# Altium PCB PCB_2020-11-10_20-37-01.pcbdoc
Units mm, origin at the board's own origin, x right, y up, seen from the top; angles counter-clockwise.
Board outline 53.28 x 21 mm, 2 copper layers (Top Layer, Bottom Layer), stack 1.569 mm thick; 35 components, 69 nets, 183 pads, 48 vias.
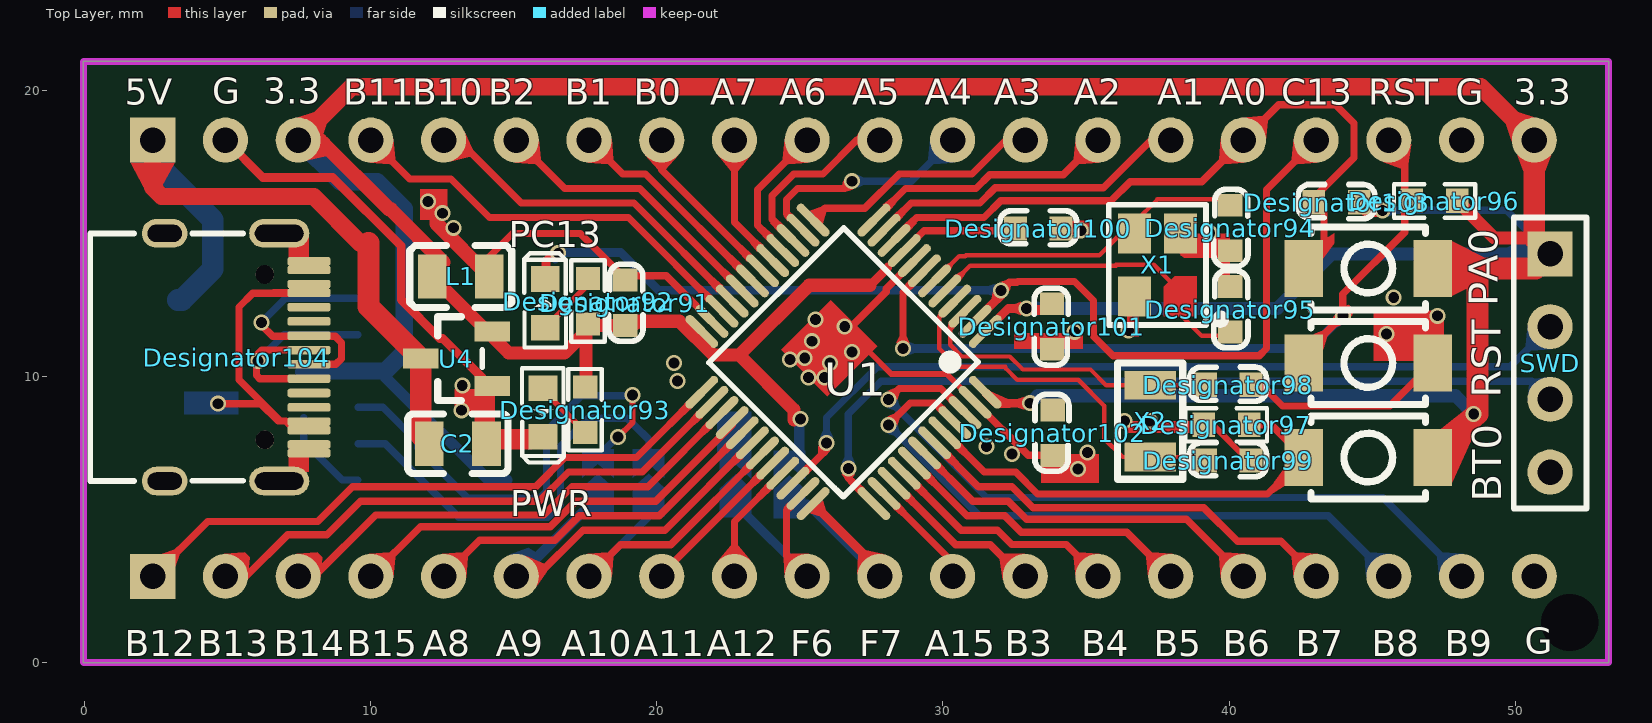
[diagram p0: Top Layer view]
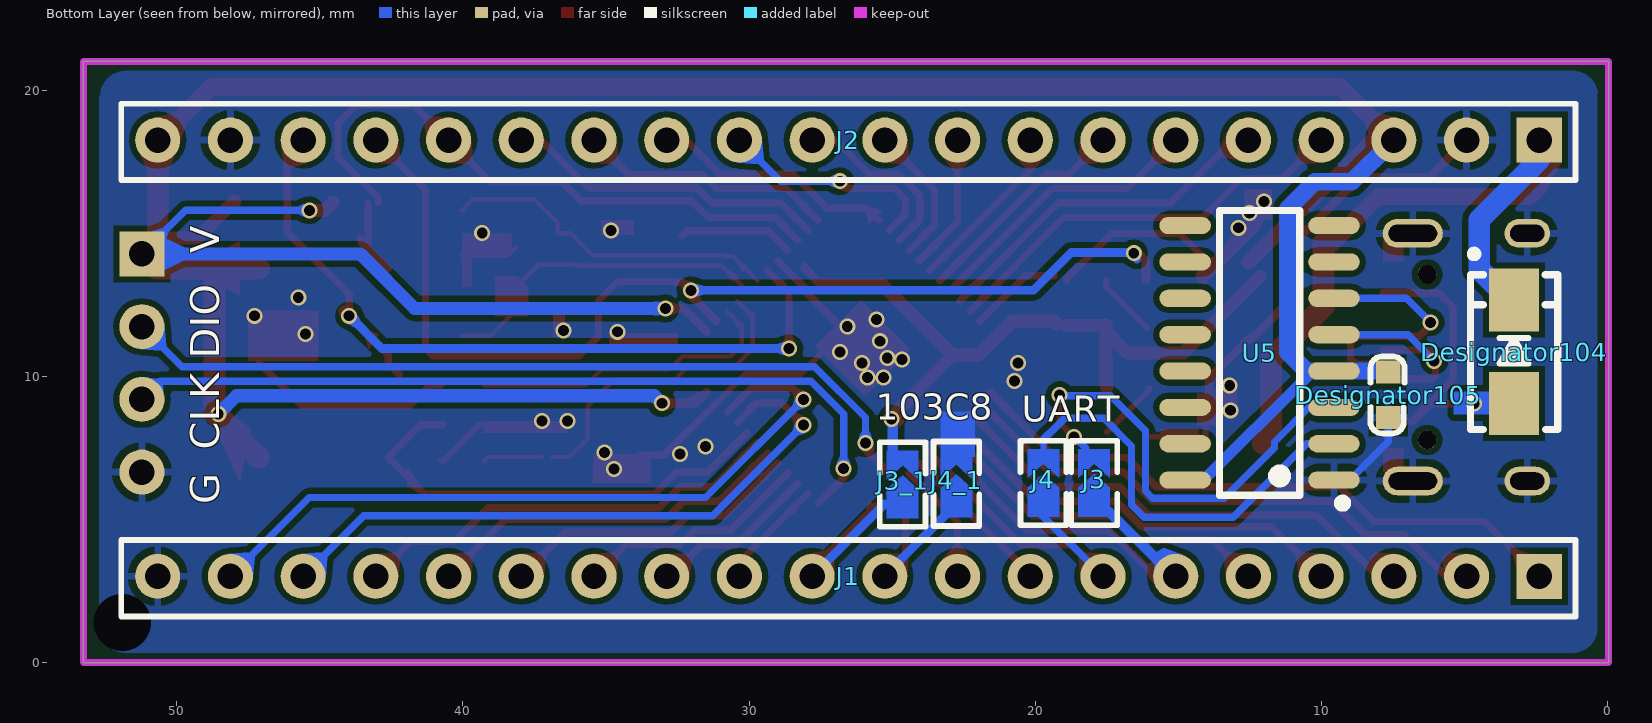
[diagram p1: Bottom Layer view, seen from below]

## Layer stack, top to bottom
Top Solder: solder mask 0.0254, SM-001, Dk 4
Top Layer: signal copper 0.035
Dielectric 1: core 1.4986, Core-043, Dk 4.3
Bottom Layer: signal copper 0.035
Bottom Solder: solder mask 0.0254, SM-001, Dk 4

## Board outline
-0.025,0 -0.025,21 53.25,21 53.25,0

## Design rules (kind name [scope] priority, off if disabled: settings)
Clearance [All] p1: gap=0.203 ignorepadtopadclearanceinfootprint=FALSE except(0: Arc-Hole Track-Hole SMDPad-Hole THPad-Hole Via-Hole Fill-Hole Poly-Hole Region-Hole Text-Hole)
PolygonConnect PolygonConnect_1 [IsVia] p1: connectstyle=Direct reliefconductorwidth=0.254 reliefentries=4 polygonreliefangle="90 Angle" airgapwidth=0.254
PolygonConnect [All] p2: connectstyle=Relief reliefconductorwidth=0.254 reliefentries=4 polygonreliefangle="90 Angle" airgapwidth=0.254
RoutingVias [All] p1: holewidth=0.711 width=1.27 viastyle="Through Hole" minholewidth=0.711 minwidth=1.27 maxholewidth=0.711 maxwidth=1.27
SolderMaskExpansion [All] p1: expansion=0.102 istentingtop=FALSE
Width [All] p1: maxlimit=2.54 minlimit=0.152 preferedwidth=0.254
30 further rules are at their usual default settings.

## Components (designator, comment, footprint, x,y, rotation, side; value= is the part's Value field where it differs from the comment)
BT0 "TS-1088R-02026" SW-SMD_L3.9-W3.0-P4.45 44.856,7.163 r0 top
C2 "10u" C0805 13.056,7.645 r180 top
Designator91 "Comment" 0603_C 18.898,12.598 r270 top
Designator92 "Comment" 0603-R 17.602,12.624 r270 top
Designator93 "Comment" 0603-R 17.501,8.839 r90 top
Designator94 "Comment" 0603_C 40.03,15.215 r270 top
Designator95 "Comment" 0603_C 40.03,12.37 r270 top
Designator96 "Comment" 0603-R 47.168,16.129 r180 top
Designator97 "Comment" 0603-R 39.903,8.306 r0 top
Designator98 "Comment" 0603_C 39.929,9.703 r0 top
Designator99 "Comment" 0603_C 39.929,7.061 r0 top
Designator100 "Comment" 0603_C 33.299,15.164 r0 top
Designator101 "Comment" 0603_C 33.807,11.709 r90 top
Designator102 "Comment" 0603_C 33.833,8.001 r90 top
Designator103 "Comment" 0603_C 43.713,16.078 r0 top
Designator104 "Comment" USB-TYPE-C- 5.334,10.668 r180 top
Designator104 "Comment" DO-SMAA 3.277,10.846 r90 bottom
Designator105 "Comment" 0603_C 7.671,9.322 r90 bottom
J1 "HDR-M-2.54_1x20" HDR-M-2.54_1X20 26.525,3.013 r180 bottom
J2 "HDR-M-2.54_1x20" HDR-M-2.54_1X20 26.525,18.253 r180 bottom
J3 "JUMPER" JUMPER-0603 17.941,6.402 r90 bottom
J3_1 "JUMPER" JUMPER-0603 24.638,6.35 r90 bottom (schematic designator J3)
J4 "JUMPER" JUMPER-0603 19.719,6.402 r90 bottom
J4_1 "JUMPER" JUMPER-0603 22.758,6.375 r90 bottom (schematic designator J4)
L1 "10uH" L0805 13.157,13.487 r0 top
PA0 "TS-1088R-02026" SW-SMD_L3.9-W3.0-P4.45 44.856,13.767 r0 top
PC13 "LED-0603_R" LED0603_RED 16.104,12.548 r90 top
PWR "LED-0603_G" LED0603_GREEN 16.027,8.738 r270 top
RST "TS-1088R-02026" SW-SMD_L3.9-W3.0-P4.45 44.856,10.465 r0 top
SWD "HDR-M-2.54_1x4" HDR-M-2.54_1X4 51.206,10.465 r270 top
U1 "STM32F030C8T6" LQFP-48_L7.0-W7.0-P0.50-LS9.0-BL 26.525,10.506 r135 top locked
U4 "XC6206P332MR" SOT-23(SOT-23-3) 13.005,10.617 r90 top
U5 "CH340G" SOP16_L 12.167,10.82 r0 bottom
X1 "8MHz" OSC-SMD_4P-L3.2-W2.5-BL 37.49,13.894 r90 top
X2 "32.768KHz" OSC-SMD_L3.2-W1.5 37.236,8.433 r90 top

## Footprints (in the part's own frame and the unit in brackets; to place one, negate y for a bottom-side part, rotate by r counter-clockwise, add the part's x,y. Pads: shape width x height; smd on the part's side, far side on the other; paste and mask are expansions set on the pad)
0603-R [mm]
  rect 0.8x0.85 smd: 1(-0.795,0) 2(0.795,0)
  silkscreen extent -1.43,-0.58 1.42,0.58, body extent -0.8,-0.41 0.8,0.39, height 0.4
0603_C [mm]
  rect 0.8x0.85 smd: 1(-0.762,0) 2(0.827,0)
  silkscreen extent -1.32,-0.57 1.37,0.62, body extent -0.8,-0.41 0.8,0.41, height 0.81
C0805 [mm]
  rect 1x1.55 smd: 1(-1,0) 2(1,0)
  silkscreen extent -1.75,-1.04 1.75,1.04
DO-SMAA [mm] "4.5x2.6*2.2mm（长宽高，不包括引脚）"
  rect 2.2x1.75 smd: 1(-1.8,0) 2(1.825,0)
  silkscreen extent -2.7,-1.52 3.56,1.52, body extent -2.53,-1.3 2.58,1.3, height 2.15
HDR-M-2.54_1X4 [mil]
  rect 62x62 hole 35: 1(-150,0)
  round 62 hole 35: 2(-50,0) 3(50,0) 4(150,0)
  silkscreen extent -200,-50 200,50
HDR-M-2.54_1X20 [mil]
  rect 62x62 hole 35: 1(950,0)
  round 62 hole 35: 2(850,0) 3(750,0) 4(650,0) 5(550,0) 6(450,0) 7(350,0) 8(250,0) 9(150,0) 10(50,0) 11(-50,0) 12(-150,0) 13(-250,0) 14(-350,0) 15(-450,0) 16(-550,0) 17(-650,0) 18(-750,0) 19(-850,0) 20(-950,0)
  silkscreen extent -1000,-55 1000,50
JUMPER-0603 [mm]
  Top Layer region: 1.05,-0.55 0.05,-0.55 0.55,0 0.05,0.55 1.05,0.55
  Top Layer region: -0.3,-0.55 -1.3,-0.55 -1.3,0.55 -0.3,0.55 0.2,0
  silkscreen extent -1.6,-0.8 1.35,0.8
L0805 [mm]
  rect 1x1.55 smd: 1(-1,0) 2(1,0)
  silkscreen extent -1.78,-1.08 1.78,1.08
LED0603_GREEN [mm]
  rect 0.9x1 smd: 1(-0.85,0) 2(0.85,0)
  silkscreen extent -1.54,-0.73 1.75,0.73
LED0603_RED [mm]
  rect 0.9x1 smd: 1(-0.85,0) 2(0.85,0)
  silkscreen extent -1.54,-0.73 1.75,0.73
LQFP-48_L7.0-W7.0-P0.50-LS9.0-BL [mm]
  oval 0.3x1.5 smd: 1(-2.75,-4.25) 2(-2.25,-4.25) 3(-1.75,-4.25) 4(-1.25,-4.25) 5(-0.75,-4.25) 6(-0.25,-4.25) 7(0.25,-4.25) 8(0.75,-4.25) 9(1.25,-4.25) 10(1.75,-4.25) 11(2.25,-4.25) 12(2.75,-4.25) 25(2.75,4.25) 26(2.25,4.25) 27(1.75,4.25) 28(1.25,4.25) 29(0.75,4.25) 30(0.25,4.25) 31(-0.25,4.25) 32(-0.75,4.25) 33(-1.25,4.25) 34(-1.75,4.25) 35(-2.25,4.25) 36(-2.75,4.25)
  oval 1.5x0.3 smd: 13(4.25,-2.75) 14(4.25,-2.25) 15(4.25,-1.75) 16(4.25,-1.25) 17(4.25,-0.75) 18(4.25,-0.25) 19(4.25,0.25) 20(4.25,0.75) 21(4.25,1.25) 22(4.25,1.75) 23(4.25,2.25) 24(4.25,2.75) 37(-4.25,2.75) 38(-4.25,2.25) 39(-4.25,1.75) 40(-4.25,1.25) 41(-4.25,0.75) 42(-4.25,0.25) 43(-4.25,-0.25) 44(-4.25,-0.75) 45(-4.25,-1.25) 46(-4.25,-1.75) 47(-4.25,-2.25) 48(-4.25,-2.75)
  silkscreen extent -3.33,-3.31 3.3,3.34
OSC-SMD_4P-L3.2-W2.5-BL [mm]
  rect 1.4x1.15 smd: 2(1.1,-0.8) 3(1.1,0.8) 4(-1.1,0.8)
  Top Layer region: -1.8,-0.225 -0.762,-0.225 -0.4,-0.604 -0.4,-1.375 -1.8,-1.375
  silkscreen extent -2.1,-2.35 2.1,1.7
OSC-SMD_L3.2-W1.5 [mm]
  rect 1x1.8 smd: 1(-1.25,0) 2(1.25,0)
  silkscreen extent -2.03,-1.14 2.03,1.14
SOP16_L [mm]
  oval 1.8x0.6 smd: 1(-2.6,4.445) 2(-2.6,3.175) 3(-2.6,1.905) 4(-2.6,0.635) 5(-2.6,-0.635) 6(-2.6,-1.905) 7(-2.6,-3.175) 8(-2.6,-4.445) 9(2.6,-4.445) 10(2.6,-3.175) 11(2.6,-1.905) 12(2.6,-0.635) 13(2.6,0.635) 14(2.6,1.905) 15(2.6,3.175) 16(2.6,4.445)
  silkscreen extent -3.05,-4.97 1.4,5.4, body extent -2,-5.08 2,5.08, height 1.75
SOT-23(SOT-23-3) [mm]
  rect 0.7x1.25 smd: 1(-0.95,-1.25) 2(0.95,-1.25) 3(0,1.25)
  silkscreen extent -1.46,-0.9 1.46,0.65
SW-SMD_L3.9-W3.0-P4.45 [mm]
  rect 1.35x2 smd: 1(-2.25,0) 2(2.25,0)
  silkscreen extent -2,-1.45 2,1.45
USB-TYPE-C- [mm]
  round 0.65 hole 0.65: 0(-0.98,2.89) 0(-0.98,-2.89)
  oval 1.6x1 hole 0.6 slot 1.2 at 0 deg: 1(2.52,4.325) 2(2.52,-4.325)
  oval 2.1x1 hole 0.6 slot 1.7 at 0 deg: 3(-1.48,-4.325) 4(-1.48,4.325)
  rrect50% 1.5x0.3 smd: A1(-2.52,-3.35) A4(-2.52,-2.55) A5(-2.52,-1.25) A6(-2.52,-0.25) A7(-2.52,0.25) A8(-2.52,1.25) A9(-2.52,2.55) A12(-2.52,3.35) B1(-2.52,3.05) B4(-2.52,2.25) B5(-2.52,1.75) B6(-2.52,0.75) B7(-2.52,-0.75) B8(-2.52,-1.75) B9(-2.52,-2.25) B12(-2.52,-3.05)
  silkscreen extent -0.22,-4.33 5.12,4.33, body extent -2.64,-4.48 5.26,4.46, height 3.28

## Part data
U5: "USB2UART"

## Free pads (board coordinates)
  round 1.524 hole 2 mask+0.102: 1(51.892,1.397)

## Via types
v1: diameter 0.559, hole 0.381, Top Layer to Bottom Layer, 48 vias

## Nets (pads, with @x,y where several pads share a name; then routed paths per layer and width w, separated by ;. In a path a pad name is that pad's centre, name@x,y a point inside that pad or via, vN(x,y) a via of type N, cw(c..) or ccw(c..) an arc to the next point about the centre after c; other vN are vias at no path point)
+3.3: 
+5V: C2.2 Designator104.2@3.277,12.671 J2.1 U4.3 | length 24.9
  Top Layer w0.61: J2.1 2.395,16.604 2.718,16.281 8.026,16.281 9.652,14.656 9.931,14.656
  Top Layer w0.762: 9.931,14.656 9.931,12.441 U4.3 11.755,7.946 C2.2
  Bottom Layer w0.762: J2.1 2.395,17.569 4.496,15.469 4.496,13.741 3.425,12.671 Designator104.2@3.277,12.671
BOOT0: BT0.1 Designator97.2 U1.44 | length 16.3
  Top Layer w0.254: U1.44 31.438,6.655 32.537,6.655 33.299,5.893 41.336,5.893 BT0.1 41.463,8.306 Designator97.2
CC1: Designator104.A5
CC2: Designator104.B5
DTR: U5.13
GND: C2.1 Designator91.1 Designator94.2 Designator95.1 Designator97.1 Designator98.2 Designator99.2 Designator100.2 Designator101.1 Designator102.1 Designator104.1@2.814,6.343 Designator104.2@2.814,14.993 Designator104.3 Designator104.4 Designator104.A1 Designator104.A12 Designator104.B1 Designator104.B12 Designator105.1 J1.20 J2.2 J2.19 L1.2 pad.1 PWR.2 RST.2 SWD.4 U1.8 U1.23 U1.47 U4.1 U5.1 X1.2 X1.4 | length 57.7
  Top Layer w0.152: X1.2@38.163,14.486 38.44,14.209 Designator94.2@40.03,14.209
  Top Layer w0.203: 14.056,9.271 C2.1 14.298,7.888 PWR.2 ; v1(26.822,10.846) 27.432,10.846 28.194,10.084 30.129,10.084 U1.47 ; Designator97.1 39.421,8.306 40.665,7.061 Designator99.2
  Top Layer w0.254: L1.2 14.157,14.183 14.961,14.986 17.327,14.986 18.898,13.415 Designator91.1 ; 19.329,13.513 20.336,13.513 U1.23 ; v1(26.568,11.735) 26.8,11.735 28.016,12.951 28.016,13.057 U1.8 ; U1.47 32.974,7.239 Designator102.1 ; Designator98.2 41.123,9.703 41.859,8.966 45.608,8.966 RST.2
  Top Layer w0.305: J2.2 6.246,16.942 8.688,16.942 11.074,14.556 11.074,12.675 12.426,11.323 12.527,11.323 13.919,9.931 13.919,9.271
  Top Layer w0.508: 12.319,16.129 12.319,15.326 L1.2
  Bottom Layer w0.254: Designator105.1 7.671,7.722 9.017,6.375 U5.1
  other v1: 34.722,6.756 32.41,7.29 35.052,7.341 31.521,7.544 36.347,8.433 37.236,8.433 13.183,8.814 13.208,9.677 20.726,9.83 25.298,9.957 25.857,9.957 20.599,10.465 26.06,10.465 24.663,10.592 25.171,10.643 25.425,11.227 45.491,11.481 34.595,11.557 36.474,11.608 25.552,11.989 47.269,12.116 45.745,12.751 39.319,15.011 34.823,15.088 12.903,15.189 12.522,15.697 12.014,16.104
J3_1: U5.3 | length 16.4
  Top Layer w0.203: v1(18.644,7.874) 19.152,8.382 v1(19.152,9.347)
  Bottom Layer w0.254: U5.3 10.439,8.915 11.646,7.709 11.646,7.506 13.407,5.745 15.905,5.745 16.154,5.994 16.154,8.103 17.374,9.322 v1@19.101,9.322 ; 18.237,7.01 18.237,7.493 v1@18.644,7.899
J4_1: U5.2 | length 15.1
  Bottom Layer w0.203: 19.456,8.045 19.514,8.045 19.719,7.84 19.719,7.202
  Bottom Layer w0.254: U5.2 10.516,7.645 13.081,5.08 16.205,5.08 16.637,5.512 16.637,7.569 17.602,8.534 18.967,8.534 19.719,7.782
NRST: Designator96.2 J2.18 RST.1 U1.7 | length 28.9
  Top Layer w0.254: v1(28.6,10.973) 28.6,12.934 U1.7 ; RST.1@42.217,10.076 RST.1 42.606,10.754 v1(43.967,12.116) 43.967,12.878 46.126,15.037 46.126,17.701 J2.18
  Bottom Layer w0.305: v1(28.6,10.973) 42.824,10.973 v1(43.967,12.116)
OSC32-IN: Designator98.1 U1.3 X2.2 | length 11
  Top Layer w0.152: U1.3 30.251,11.76 30.251,11.1 30.658,10.693 32.334,10.693 32.791,10.236 35.154,10.236 35.707,9.683 X2.2 39.248,9.683 Designator98.1@39.268,9.703
OSC32-OUT: Designator99.1 U1.4 X2.1 | length 13.2
  Top Layer w0.152: U1.4@30.414,12.624 29.87,12.083 29.87,10.973 30.505,10.338 32.182,10.338 32.182,10.287 32.588,9.881 34.722,9.881 35.636,8.966 35.636,7.823 36.276,7.183 X2.1@36.855,7.183 ; X2.1 39.121,7.183 Designator99.1@39.268,7.036
OSC-IN: Designator95.2 U1.5 | length 11
  Top Layer w0.152: U1.5@30.061,12.982 30.594,13.513 30.949,13.868 36.043,13.868 ; 36.043,13.894 37.363,13.894 38.125,13.132 ; 38.163,12.286 39.034,11.415 Designator95.2@40.03,11.415
OSC-OUT: Designator94.1 U1.6 X1.3 | length 11.9
  Top Layer w0.152: U1.6 30.571,14.199 30.777,14.199 30.802,14.224 35.458,14.224 36.228,14.994 X1.3 36.69,15.38 37.49,16.18 39.649,16.18 Designator94.1@40.03,15.799
PA0: Designator103.1 J2.16 PA0.1 U1.10 | length 24.2
  Top Layer w0.254: U1.10 29.088,15.545 31.431,15.545 32.016,16.129 35.872,16.129 36.537,16.794 39.035,16.794 J2.16 41.725,19.482 43.713,19.482 44.356,18.839 44.356,17.635 42.951,16.231 Designator103.1 ; PA0.1 43.307,14.467 Designator103.1@43.307,16.053
PA1: J2.15 U1.11 | length 11.3
  Top Layer w0.254: U1.11 28.89,16.053 31.293,16.053 31.826,16.586 35.611,16.586 37.277,18.253 J2.15
PA2: J2.14 U1.12 | length 9
  Top Layer w0.254: U1.12 28.692,16.561 31.154,16.561 31.637,17.043 34.206,17.043 J2.14
PA3: J2.13 U1.13 | length 8.6
  Top Layer w0.254: U1.13@25.463,15.456 25.875,15.867 27.272,15.867 28.473,17.069 31.016,17.069 32.2,18.253 J2.13
PA4: J2.12 U1.14 | length 8
  Top Layer w0.254: U1.14 24.536,15.677 24.536,16.18 24.917,16.561 25.298,16.561 26.568,16.561 v1(26.822,16.815)
  Bottom Layer w0.254: v1(26.822,16.815) 28.898,16.815 J2.12
PA5: J2.11 U1.15 | length 6.4
  Top Layer w0.254: U1.15 24.028,15.479 24.028,16.307 24.79,17.069 25.806,17.069 26.99,18.252 J2.11
PA6: J2.10 U1.16 | length 4.9
  Top Layer w0.254: U1.16 23.52,15.278 23.52,16.518 J2.10
PA7: J2.9 U1.17 | length 4.8
  Top Layer w0.254: J2.9 22.715,15.377 U1.17
PA8: J1.5 U1.29 | length 12.5
  Top Layer w0.254: J1.5 13.813,4.27 16.436,4.27 17.297,5.131 20.089,5.131 U1.29
PA9: J1.6 U1.30 | length 17.2
  Top Layer w0.254: J1.6 15.814,3.012 17.424,4.623 20.287,4.623 U1.30
  Bottom Layer w0.254: 17.399,5.316 J1.6 15.23,3.013 17.819,5.602
PA10: J1.7 U1.31 | length 11.8
  Top Layer w0.254: J1.7 18.738,4.115 20.488,4.115 U1.31@23.696,7.323
  Bottom Layer w0.254: J1.7@17.424,3.223 J1.7 19.914,5.291 19.914,5.74
PA11: J1.8 U1.32 | length 5.6
  Top Layer w0.254: J1.8 20.175,3.094 U1.32
PA12: J1.9 U1.33 | length 4.3
  Top Layer w0.254: J1.9 22.715,4.928 U1.33
PA15: J1.12 U1.38 | length 3.9
  Top Layer w0.254: U1.38 30.335,3.513 J1.12
PB0: J2.8 U1.18 | length 6
  Top Layer w0.254: J2.8 20.175,17.209 U1.18@23.696,13.688
PB1: J2.7 U1.19 | length 7.7
  Top Layer w0.254: J2.7 18.819,17.069 19.609,17.069 U1.19
PB2: J2.6 U1.20 | length 10.1
  Top Layer w0.254: J2.6 16.787,16.561 19.411,16.561 U1.20
PB3: J1.13 U1.39 | length 5.9
  Top Layer w0.254: U1.39 30.442,4.115 31.648,4.115 32.751,3.012 J1.13
PB4: J1.14 U1.40 | length 8.3
  Top Layer w0.254: U1.40 30.64,4.623 31.902,4.623 32.403,4.122 34.305,4.122 J1.14
PB5: J1.15 U1.41 | length 10.6
  Top Layer w0.254: U1.41 30.838,5.131 32.156,5.131 32.736,4.552 36.416,4.552 J1.15
PB6: J1.16 U1.42 | length 12.9
  Top Layer w0.254: U1.42 31.039,5.639 32.283,5.639 32.918,5.004 38.504,5.004 J1.16
PB7: J1.17 U1.43 | length 15.3
  Top Layer w0.254: U1.43 31.237,6.147 32.41,6.147 33.144,5.413 39.113,5.413 40.284,4.242 41.806,4.242 J1.17
PB8: J1.18 U1.45 | length 22.6
  Top Layer w0.254: v1(28.092,8.306) 28.854,9.068 29.731,9.068 U1.45
  Bottom Layer w0.254: v1(28.092,8.306) 31.267,5.131 43.457,5.131 J1.18
PB9: J1.19 U1.46 | length 25.8
  Top Layer w0.254: v1(28.092,9.195) 28.473,9.576 29.931,9.576 U1.46
  Bottom Layer w0.254: v1(28.092,9.195) 31.521,5.766 45.362,5.766 J1.19
PB10: J2.5 U1.21 | length 12.4
  Top Layer w0.254: J2.5 13.066,18.252 15.265,16.053 19.21,16.053 U1.21
PB11: J2.4 U1.22 | length 14.7
  Top Layer w0.254: J2.4 11.372,16.896 12.812,16.896 14.163,15.545 19.012,15.545 U1.22
PB12: J1.1 U1.25 | length 21.8
  Top Layer w0.254: J1.1 4.314,4.931 8.157,4.931 9.373,6.147 15.773,6.147 16.789,7.163 19.291,7.163 U1.25
PB13: J1.2 U1.26 | length 19.5
  Top Layer w0.254: J1.2 5.654,3.013 7.112,4.47 8.484,4.47 9.652,5.639 15.9,5.639 16.916,6.655 19.494,6.655 U1.26
PB14: J1.3 U1.27 | length 17.2
  Top Layer w0.254: J1.3 8.042,3.013 10.188,5.159 16.055,5.159 17.043,6.147 19.693,6.147 U1.27
PB15: J1.4 U1.28 | length 14.9
  Top Layer w0.254: J1.4 11.753,4.75 16.281,4.75 17.17,5.639 19.964,5.639 22.636,8.311 U1.28
PC13: J2.17 PC13.2 U1.2 | length 38.2
  Top Layer w0.254: v1(32.029,13.005) 32.309,13.284 32.588,13.284 32.614,13.31 34.595,13.31 35.255,12.649 35.255,11.405 35.941,10.719 41.046,10.719 41.3,10.973 41.3,16.518 J2.17
  Top Layer w0.305: PC13.2@16.135,13.366 16.135,14.027 16.408,14.3 v1(16.561,14.3) ; U1.2 32.029,12.827 v1(32.029,13.005)
  Bottom Layer w0.305: v1@16.459,14.097 16.688,14.326 18.745,14.326 20.066,13.005 v1(32.029,13.005)
PF6: J1.10 U1.35 | length 7
  Top Layer w0.254: U1.35 24.536,5.334 24.536,3.731 J1.10
  Bottom Layer w0.203: 22.86,5.359 22.936,5.359 ; J1.10@25.197,3.099 J1.10@25.502,3.099
  Bottom Layer w0.305: 22.936,5.359 J1.10@25.197,3.099
PF7: J1.11 U1.36 | length 7.3
  Top Layer w0.254: J1.11 J1.11@27.795,3.226
  Top Layer w0.305: U1.36@25.555,5.464 J1.11@27.795,3.226
  Bottom Layer w0.203: 24.638,5.55 25.26,5.55
  Bottom Layer w0.305: 25.26,5.55 J1.11@27.584,3.226
PGND: 
PWR_1: Designator93.1 PWR.1 | length 2.2
  Top Layer w0.203: PWR.1 16.027,9.518 Designator93.1
Q1_3: 
R3_1: Designator92.1 PC13.1 | length 2.3
  Top Layer w0.203: PC13.1 17.526,13.12 Designator92.1@17.526,13.393
RTS: U5.14
S$33: 
S$35: 
S$39: 
S$69: 
S$2359: 
SWCLK: SWD.3 U1.37 | length 28.7
  Top Layer w0.254: v1(26.695,6.782) 26.695,6.447 U1.37
  Bottom Layer w0.254: v1(26.695,6.782) 26.695,8.687 27.838,9.83 50.571,9.83 SWD.3
SWDIO: SWD.2 U1.34 | length 29.4
  Top Layer w0.254: U1.34 25.933,7.44 v1(25.933,7.671)
  Bottom Layer w0.254: v1(25.933,7.671) 25.933,8.56 27.711,10.338 49.809,10.338 SWD.2
U2_1: 
U2_2: 
USB_1: 
USB_D+: 
USB_D-: 
USBD+: Designator104.A6 Designator104.B6 U5.5 | length 8.4
  Top Layer w0.254: Designator104.B6 6.135,9.918 6.02,10.033 6.02,10.744 6.194,10.918 Designator104.A6
  Bottom Layer w0.254: v1(6.071,10.541) 6.985,11.455 U5.5
USBD-: Designator104.A7 Designator104.B7 U5.6 | length 8.6
  Top Layer w0.254: v1(6.198,11.887) 6.198,11.786 6.585,11.398 8.769,11.398 8.992,11.176 8.992,10.617 8.792,10.418 Designator104.A7
  Bottom Layer w0.254: v1(6.198,11.887) 7.036,12.725 U5.6
VBUS-OUT: Designator104.1@3.277,9.046 Designator104.A4 Designator104.A9 Designator104.B4 Designator104.B9 | length 11.5
  Top Layer w0.254: v1(4.674,9.042) 6.169,9.042 6.774,8.438 6.853,8.438 ; 6.619,12.918 Designator104.B9 ; Designator104.A9@7.366,8.118 7.046,8.438 6.853,8.438 ; Designator104.B9@7.854,12.903 5.892,12.903 5.41,12.421 5.41,9.881 6.853,8.438
VCC: BT0.2 Designator91.2 Designator92.2 Designator93.2 Designator96.1 Designator100.1 Designator101.2 Designator102.2 Designator103.2 Designator105.2 J2.3 J2.20 L1.1 PA0.2 SWD.1 U1.1 U1.9 U1.24 U1.48 U4.2 U5.4 U5.16 | length 164
  Top Layer w0.254: U1.9 29.339,15.088 32.156,15.088 Designator100.1@32.334,14.91
  Top Layer w0.305: 27.457,13.183 28.07,13.796 28.07,13.819 ; U1.48 31.859,9.06 v1(33.045,9.06) ; U1.1 32.278,12.37 v1(32.918,12.37)
  Top Layer w0.457: L1.1 14.829,10.816 16.782,10.816 Designator92.2@17.526,11.559 ; Designator93.2 17.526,9.659 Designator92.2@17.526,11.559 ; Designator91.2 17.559,11.771 17.526,11.804 Designator92.2@17.526,11.559 ; Designator91.2@19.235,11.829 19.329,11.923 20.792,11.923 21.971,10.744 22.555,10.744 22.885,10.744 ; v1@24.79,8.484 24.79,8.839 22.885,10.744 ; 27.457,13.183 25.324,13.183 22.885,10.744 ; Designator103.2 44.82,15.799 v1(45.356,15.799) ; Designator96.1 49.266,14.826 SWD.1@50.655,14.826
  Top Layer w0.508: J2.3 8.24,18.252 10.654,15.838 10.701,15.838 L1.1@12.548,13.991
  Top Layer w0.61: J2.3 9.34,20.117 48.791,20.117 J2.20
  Top Layer w0.762: BT0.2 47.142,7.163 48.666,8.687 48.666,13.767 ; PA0.2 50.698,13.767 SWD.1 50.655,14.826 J2.20
  Bottom Layer w0.254: v1(45.356,15.799) 49.682,15.799 SWD.1
  Bottom Layer w0.381: 10.516,10.185 10.516,9.982 14.122,6.375 U5.16
  Bottom Layer w0.457: v1(32.918,12.37) 41.681,12.37 43.586,14.275 SWD.1 ; v1(33.045,9.06) 33.307,9.322 47.904,9.322 v1(48.539,8.687)
  Bottom Layer w0.61: J2.3 8.939,16.789 10.236,16.789 11.176,15.85 11.176,10.846 10.516,10.185 U5.4 7.707,10.185 Designator105.2
  other v1: 25.019,8.509
VDDA: 
pads on no net: Designator104.0 Designator104.A8 Designator104.B8 U5.7 U5.8 U5.9 U5.10 U5.11 U5.12 U5.15

## Polygon pours and split planes (outlines as drawn)
GND on Bottom Layer "Bottom Layer-No Net" (solid, remove dead copper, pour order 8): -1.219,25.756 -1.219,-1.524 -2.464,-2.769 -2.159,-2.464 56.007,-2.464 56.007,24.384 57.099,25.476 56.185,24.562 -10.82,24.562

## Keep-outs
Keep-Out Layer:
  lines w0.254: 53.2,0 -0.025,0 -0.025,21 53.2,21 ; 53.25,0 53.25,21

## Other copper
Top Layer:
  rectangle net VCC: 32.995,12.141 33.909,12.497
  rectangle net GND: 7.137,14.018 7.854,14.859
  rectangle net GND: 7.137,6.652 7.854,7.493
  rectangle net GND: 13.64,8.28 14.356,9.398
  region net GND: 15.649,7.442 15.649,8.159 14.298,8.159 14.298,7.442
  rectangle net GND: 12.929,8.661 13.792,9.55
  rectangle net GND: 11.735,15.469 12.7,16.535
  rectangle net GND: 33.426,6.274 35.458,7.29
  region net GND: 25.959,9.296 27.711,11.049 26.086,12.675 24.333,10.922
  rectangle net GND: 38.291,14.209 40.03,14.994
  rectangle net GND: 39.7,13.132 40.03,14.199
  rectangle net GND: 36.424,11.379 36.855,12.497
  rectangle net GND: 34.036,14.935 35.179,15.443
  rectangle net GND: 36.347,8.026 39.268,8.433
  rectangle net GND: 45.034,10.541 47.498,12.294
  rectangle net GND: 32.487,10.947 34.9,11.506
  region net VCC: 31.648,9.485 31.971,8.889 32.35,8.908 32.237,9.213
  region net PB9: 30.45,9.268 30.238,9.056 29.985,9.342 30.165,9.522
  region net PB8: 30.096,8.915 29.884,8.703 29.641,8.978 29.82,9.158
  region net BOOT0: 30.591,7.713 30.379,7.501 30.665,7.248 30.845,7.427
  region net PB7: 30.238,7.359 30.026,7.147 30.311,6.894 30.491,7.074
  region net PB6: 29.884,7.006 29.672,6.793 29.958,6.54 30.137,6.72
  region net PB5: 29.531,6.652 29.318,6.44 29.603,6.186 29.783,6.365
  region net PB4: 29.177,6.299 28.965,6.086 29.356,5.727 29.536,5.907
  region net PB3: 28.823,5.945 28.611,5.733 28.897,5.48 29.077,5.66
  region net PA15: 28.47,5.591 28.258,5.379 28.544,5.126 28.723,5.306
  region net SWCLK: 27.056,5.874 27.268,6.086 26.876,6.445 26.696,6.266
  region net PF7: 25.794,5.673 25.345,5.224 25.749,5.09 25.929,5.269
  region net PF6: 24.793,5.38 24.581,5.591 24.446,5.424 24.626,5.244
  region net SWDIO: 25.288,6.582 25.076,6.793 25.361,7.047 25.541,6.868
  region net PA12: 24.086,6.086 23.874,6.298 23.621,6.013 23.8,5.833
  region net PA11: 23.733,6.44 23.52,6.652 23.268,6.366 23.448,6.186
  region net PA10: 23.379,6.793 23.167,7.006 22.913,6.72 23.093,6.54
  region net PA9: 23.025,7.147 22.814,7.36 22.559,7.075 22.738,6.895
  region net PA8: 22.671,7.501 22.46,7.713 22.206,7.428 22.385,7.248
  region net PB14: 21.965,8.208 21.752,8.42 21.5,8.133 21.68,7.954
  region net PB13: 21.612,8.562 21.399,8.773 21.147,8.486 21.327,8.308
  region net PB12: 21.258,8.915 21.045,9.127 20.685,8.736 20.865,8.557
  region net VCC: 21.632,11.298 21.093,11.837 21.354,11.415 21.201,11.72
  region net PB11: 21.752,12.592 21.964,12.804 21.573,13.163 21.393,12.984
  region net PB10: 22.106,12.945 22.318,13.157 21.926,13.516 21.747,13.337
  region net PB2: 22.672,13.511 22.459,13.299 22.207,13.585 22.387,13.764
  region net PB1: 22.813,13.652 23.025,13.865 22.634,14.224 22.454,14.044
  region net PB0: 23.167,14.006 23.379,14.218 22.987,14.577 22.807,14.397
  region net PA7: 23.733,14.572 23.52,14.36 23.267,14.645 23.447,14.825
  region net PA6: 23.874,14.713 24.086,14.925 23.694,15.284 23.514,15.104
  region net PA5: 24.44,15.279 24.227,15.067 23.975,15.353 24.154,15.532
  region net PA4: 24.793,15.632 24.581,15.42 24.447,15.587 24.626,15.767
  region net PA3: 25.346,15.787 25.795,15.338 25.929,15.742 25.75,15.922
  region net PA2: 28.116,15.774 27.904,15.986 28.19,16.239 28.37,16.059
  region net PA1: 28.47,15.42 28.258,15.632 28.543,15.886 28.723,15.706
  region net PA0: 28.824,15.067 28.611,15.279 28.896,15.532 29.076,15.353
  region net NRST: 29.036,13.157 28.823,13.369 28.57,13.083 28.75,12.904
  region net OSC-OUT: 30.238,13.652 30.026,13.865 30.239,13.974 30.347,13.866
  region net OSC-IN: 30.379,13.511 30.591,13.299 30.774,13.586 30.666,13.694
  region net OSC32-OUT: 30.096,12.097 29.884,12.309 29.816,12.137 29.924,12.029
  region net OSC32-IN: 30.481,11.789 30.207,11.91 30.175,11.674 30.328,11.607
  region net +5V: 1.633,17.465 3.157,17.465 2.7,16.604 2.09,16.604
  region net PB12: 2.734,3.8 3.183,3.351 3.318,3.755 3.138,3.935
  region net VCC: 47.781,14.719 47.781,12.814 48.924,13.386 48.924,14.148
  region net PA0: 43.281,14.76 43.281,14.125 43.662,14.644 43.662,15.003
  region net VCC: 47.412,8.163 47.781,6.294 48.594,8.076 48.417,8.976
  region net BOOT0: 41.931,6.171 41.931,6.806 41.55,6.287 41.55,5.928
  region net NRST: 42.927,11.465 43.281,10.938 43.43,11.399 43.286,11.614
  region net PA4: 26.841,16.511 26.518,16.834 26.479,16.651 26.658,16.471
  region net VCC: 32.844,9.289 32.844,8.831 32.63,8.908 32.631,9.213
  region net VCC: 32.717,12.141 32.717,12.598 32.503,12.522 32.503,12.217
  region net PC13: 32.334,12.986 32.01,13.309 32.194,13.349 32.373,13.169
  region net PC13: 31.734,12.931 32.14,12.721 31.981,12.563 31.697,12.71
  region net NRST: 28.372,11.174 28.829,11.174 28.727,11.388 28.473,11.388
  region net SWDIO: 26.071,7.399 25.646,7.569 25.651,7.337 25.908,7.234
  region net SWCLK: 26.467,6.58 26.924,6.58 26.822,6.447 26.568,6.447
  region net PB9: 28.397,9.176 28.073,9.499 28.296,9.578 28.476,9.398
  region net PB8: 28.397,8.287 28.073,8.61 28.296,8.689 28.476,8.509
  region net NRST: 43.986,11.812 43.663,12.135 43.584,11.912 43.764,11.733
  region net NRST: 44.272,12.097 43.948,12.42 44.171,12.499 44.351,12.319
  region net VCC: 8.129,18.691 7.829,17.549 8.437,17.696 8.587,18.264
  region net VCC: 7.426,19.039 8.261,18.203 8.449,18.795 8.018,19.226
  region net PB11: 9.966,17.467 10.801,18.302 10.863,17.584 10.683,17.405
  region net PB10: 13.279,18.563 12.773,17.496 13.467,17.672 13.582,17.916
  region net PB2: 15.046,17.467 15.881,18.302 15.943,17.584 15.763,17.405
  region net PB1: 17.586,17.467 18.421,18.302 18.483,17.584 18.303,17.405
  region net PB0: 20.766,17.732 19.585,17.732 20.048,17.209 20.302,17.208
  region net PA7: 23.306,17.732 22.125,17.732 22.588,17.181 22.842,17.181
  region net PA6: 24.47,18.302 25.305,17.467 24.587,17.405 24.408,17.584
  region net PA5: 27.275,17.662 27.274,18.843 26.99,18.379 26.99,18.125
  region net PA2: 34.63,18.302 35.465,17.467 34.747,17.405 34.568,17.584
  region net PA0: 40.446,19.039 41.281,18.203 41.343,18.921 41.164,19.101
  region net PA0: 39.71,18.303 40.544,17.467 39.827,17.405 39.647,17.585
  region net PC13: 42.25,18.302 43.085,17.467 42.367,17.405 42.188,17.584
  region net NRST: 46.35,18.109 45.337,17.502 45.999,17.257 46.253,17.409
  region net VCC: 51.246,17.732 50.065,17.732 50.274,17.181 51.036,17.181
  region net VCC: 49.87,18.203 50.705,19.039 50.113,19.226 49.682,18.795
  region net PB13: 4.886,3.799 5.721,2.963 5.783,3.681 5.604,3.86
  region net PB14: 7.426,3.799 8.261,2.963 8.323,3.681 8.144,3.86
  region net PB15: 9.966,3.799 10.801,2.963 10.863,3.681 10.684,3.86
  region net PA8: 12.506,3.799 13.341,2.963 13.403,3.681 13.224,3.861
  region net PA9: 15.764,2.597 15.425,3.728 16.081,3.459 16.164,3.183
  region net PA10: 17.586,3.799 18.421,2.963 18.483,3.681 18.304,3.861
  region net PA12: 23.306,3.534 22.125,3.533 22.588,4.085 22.842,4.085
  region net PF6: 24.47,2.963 25.305,3.799 24.626,3.821 24.447,3.641
  region net PF7: 27.954,3.784 27.01,3.074 27.049,3.792 27.254,3.946
  region net PB3: 32.86,3.8 32.096,2.899 31.975,3.608 32.14,3.803
  region net PB4: 34.63,2.963 35.465,3.799 34.747,3.86 34.567,3.681
  region net PB5: 37.17,2.963 38.005,3.799 37.287,3.86 37.107,3.681
  region net PB6: 39.71,2.963 40.545,3.799 39.827,3.86 39.647,3.681
  region net PB7: 42.25,2.963 43.085,3.799 42.367,3.86 42.187,3.681
Bottom Layer:
  rectangle net VBUS-OUT: 3.48,8.661 5.385,9.474
  rectangle net VCC: 24.79,7.175 25.171,8.534
  rectangle net GND: 22.098,7.188 23.317,8.763
  region net VCC: 50.419,13.703 50.419,14.846 49.733,14.503 49.733,14.046
  region net VCC: 50.419,14.613 50.868,15.062 50.464,15.197 50.284,15.017
  region net VCC: 48.558,8.991 48.235,8.668 48.084,8.819 48.408,9.142
  region net PA4: 27.024,16.586 27.024,17.043 27.237,16.942 27.237,16.688
  region net VCC: 33.35,9.041 33.026,9.364 33.146,9.483 33.469,9.16
  region net VCC: 33.12,12.141 33.12,12.598 33.333,12.598 33.333,12.141
  region net PC13: 31.828,12.776 31.828,13.233 31.614,13.157 31.614,12.852
  region net VCC: 45.558,15.57 45.558,16.027 45.771,15.926 45.771,15.672
  region net NRST: 28.802,10.744 28.802,11.201 29.015,11.125 29.015,10.82
  region net SWDIO: 25.705,7.872 26.162,7.872 26.06,8.086 25.806,8.086
  region net SWCLK: 26.467,6.983 26.924,6.983 26.822,7.197 26.568,7.197
  region net PB9: 28.397,9.214 28.073,8.891 28.296,8.812 28.476,8.991
  region net PB8: 28.397,8.325 28.073,8.002 28.296,7.923 28.476,8.102
  region net NRST: 43.986,11.812 43.663,12.135 43.566,11.93 43.782,11.715
  region net PA4: 29.55,18.302 30.385,17.467 29.667,17.405 29.488,17.584
  region net PB8: 44.79,2.963 45.625,3.799 44.907,3.861 44.728,3.681
  region net PB9: 47.33,2.963 48.165,3.799 47.447,3.861 47.268,3.681
  region net SWCLK: 50.421,9.145 51.256,9.981 50.661,9.92 50.482,9.74
  region net SWDIO: 50.421,11.784 51.256,10.949 50.538,10.887 50.359,11.067
  region net PA9: 15.87,3.156 14.857,3.763 15.519,4.008 15.773,3.856

## Silkscreen, mask and mechanical layers (free items; w line width, h text height)
Top Overlay:
  text "G" at 4.47,19.523 h0.91
  text "3.3" at 6.248,19.523 h0.91
  text "5V" at 1.422,19.482 h0.91
  text "B11" at 9.042,19.482 h0.91
  text "B10" at 11.455,19.482 h0.91
  text "B2" at 14.122,19.482 h0.91
  text "B1" at 16.789,19.482 h0.91
  text "B0" at 19.202,19.482 h0.91
  text "A7" at 21.869,19.482 h0.91
  text "A6" at 24.282,19.482 h0.91
  text "A5" at 26.822,19.482 h0.91
  text "A4" at 29.362,19.482 h0.91
  text "A3" at 31.775,19.482 h0.91
  text "A2" at 34.569,19.482 h0.91
  text "A1" at 37.49,19.482 h0.91
  text "A0" at 39.649,19.482 h0.91
  text "C13" at 41.808,19.482 h0.91
  text "RST" at 44.856,19.482 h0.91
  text "G" at 47.904,19.482 h0.91
  text "3.3" at 49.936,19.482 h0.91
  text "G" at 50.317,0.305 h0.91
  text "B12" at 1.422,0.229 h0.91
  text "B13" at 3.962,0.229 h0.91
  text "B14" at 6.629,0.229 h0.91
  text "B15" at 9.169,0.229 h0.91
  text "A8" at 11.836,0.229 h0.91
  text "A9" at 14.376,0.229 h0.91
  text "A10" at 16.662,0.229 h0.91
  text "A11" at 19.202,0.229 h0.91
  text "A12" at 21.742,0.229 h0.91
  text "F6" at 24.663,0.229 h0.91
  text "F7" at 27.076,0.229 h0.91
  text "A15" at 29.362,0.229 h0.91
  text "B3" at 32.156,0.229 h0.91
  text "B4" at 34.823,0.229 h0.91
  text "B5" at 37.363,0.229 h0.91
  text "B6" at 39.776,0.229 h0.91
  text "B7" at 42.316,0.229 h0.91
  text "B8" at 44.983,0.229 h0.91
  text "B9" at 47.523,0.229 h0.91
Bottom Overlay:
  text "V" at 48.514,14.3 h1.02 r270
  text "DIO" at 48.514,10.617 h1.02 r270
  text "103C8" at 25.578,8.484 h0.91
  text "UART" at 20.472,8.407 h0.91
  text "CLK" at 48.514,7.442 h1.02 r270
  text "G" at 48.514,5.537 h1.02 r270
Document:
  lines w0.003: 26.86,9.55 26.911,9.601